# EAGLE board AccessPanelV1 (EAGLE 7.2.0)
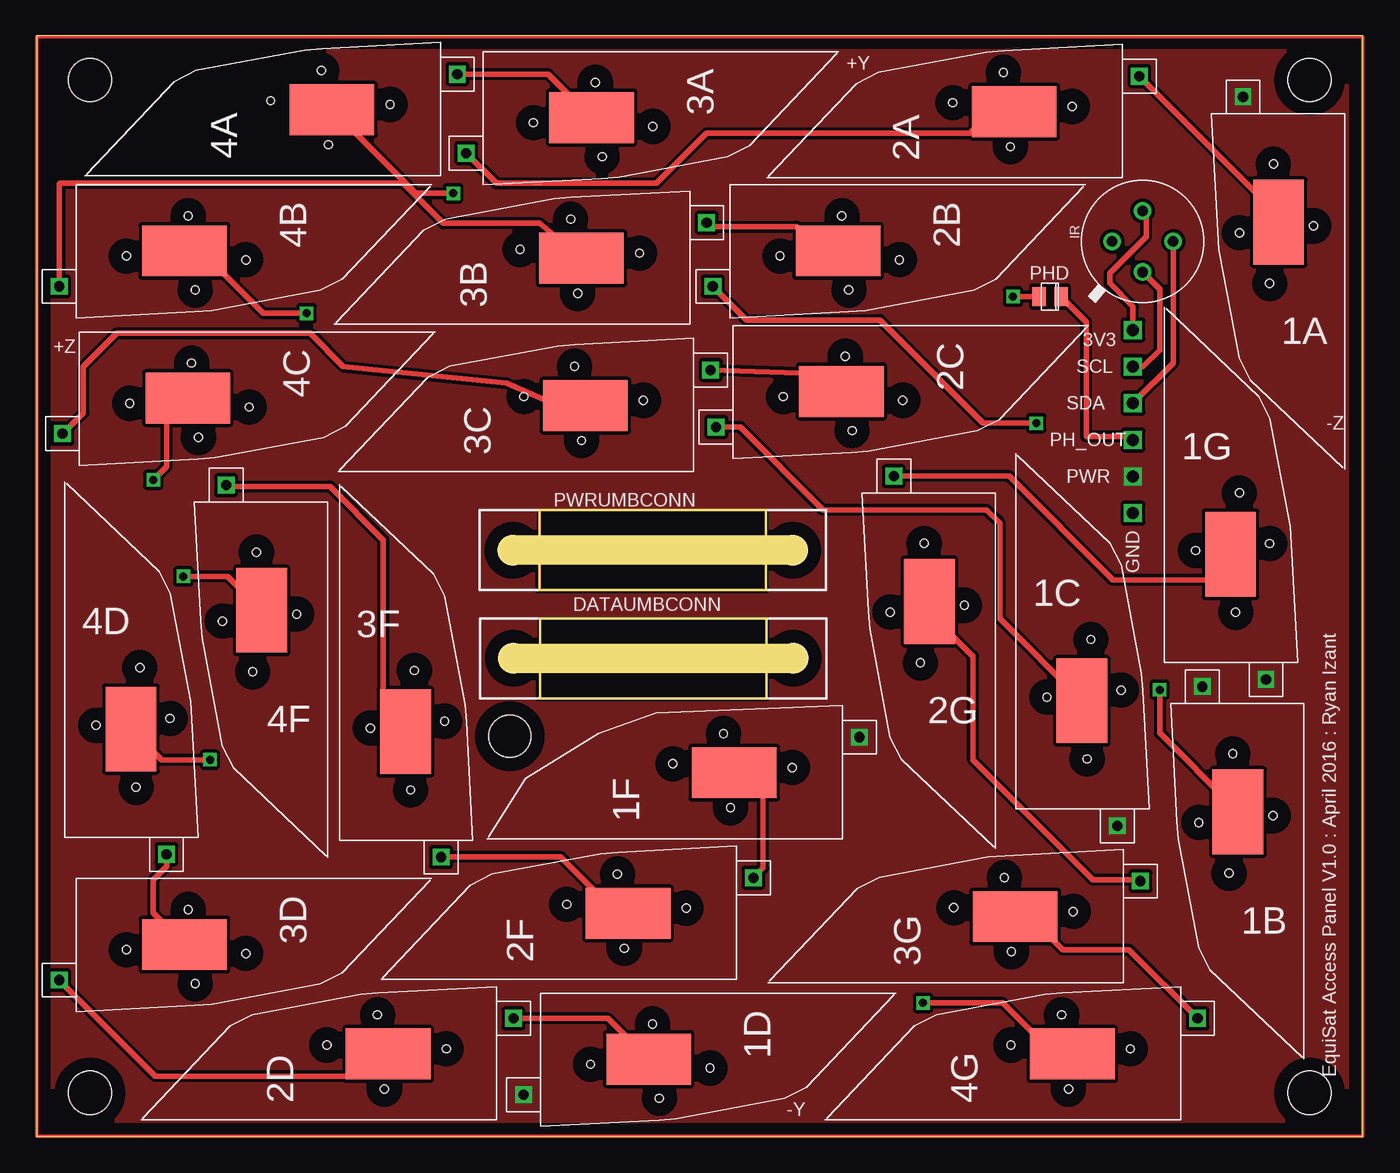
[diagram p0: board, top side]
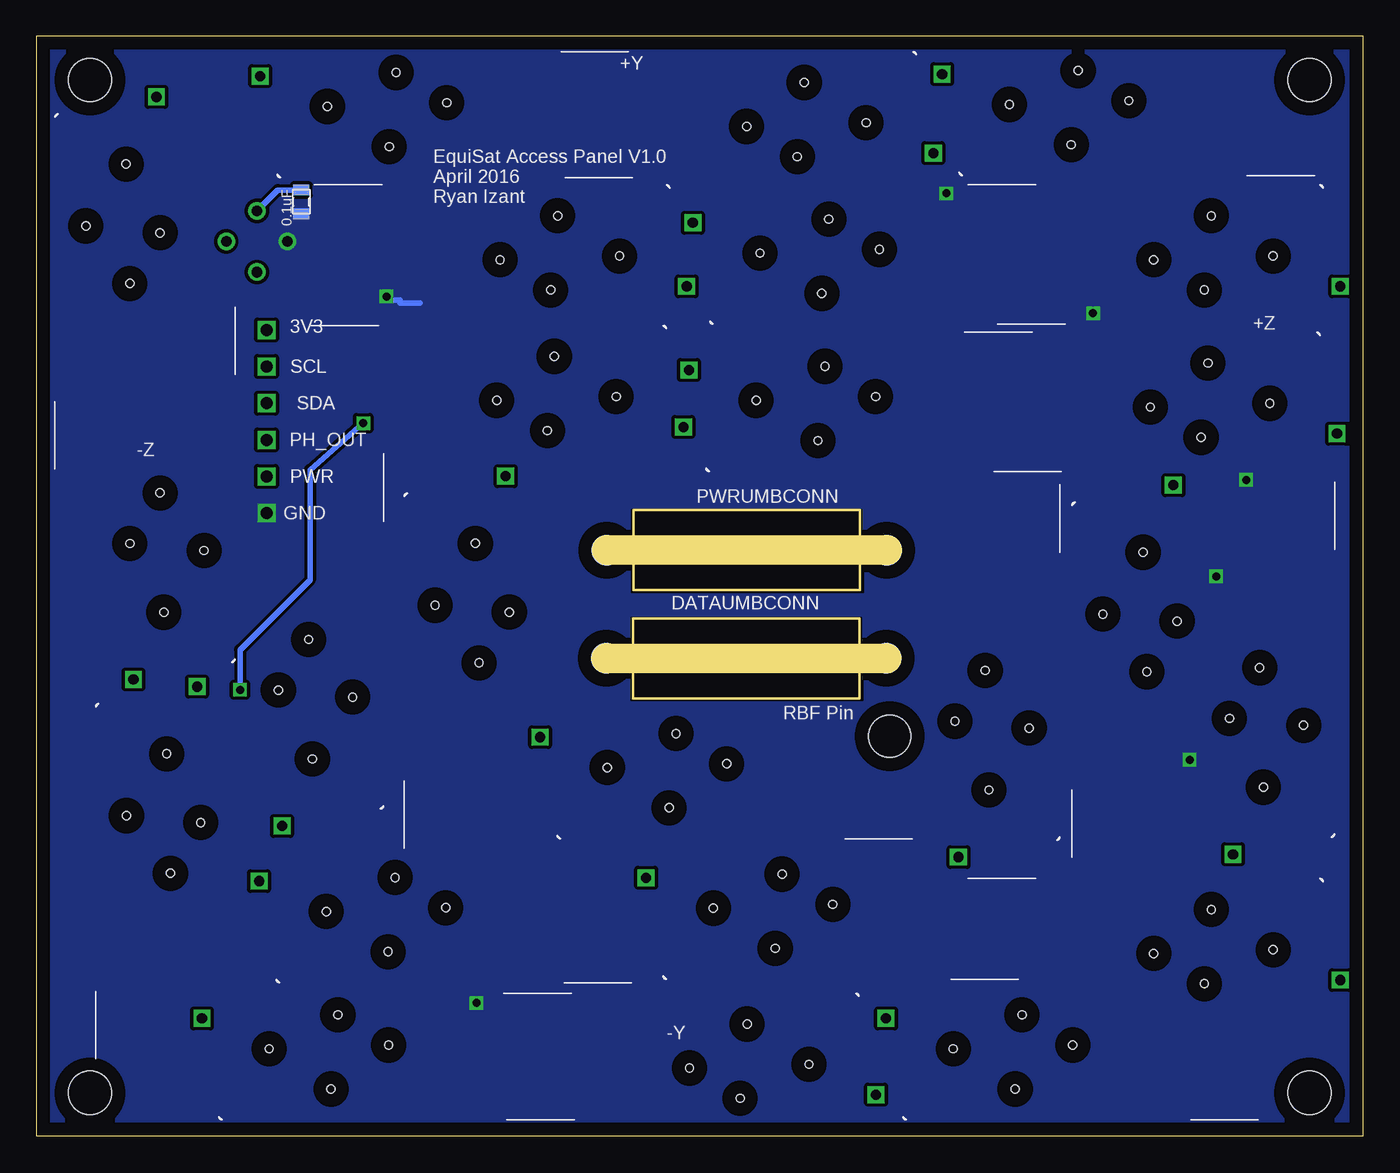
[diagram p1: board, bottom side, seen from below]

Size 99.5 x 82.57 mm. Coordinates in mm from the lower left corner, seen from the top.
Outline: 0,0 99.5,0 99.5,82.57 0,82.57 0,0
Copper layers (1*16): Top 0.035mm / dielectric 1.5mm / Bottom 0.035mm
Design rules "default": minimum track width 10mil, minimum drill 24mil, track to track 8mil, track to pad 8mil, pad to pad 8mil, via to via 8mil, smd to smd 8mil, copper to edge 40mil, drill to drill 8mil, minimum pad ring 10mil, minimum via ring 8mil, stop-mask expansion 4mil, vias tented up to drill 0mil, thermal gap 10mil
Net classes: 0 default: width 0.635 mm, drill 0.508 mm, clearance 0.254 mm
Holes 3.26 mm at 4,3.25 4,79.25 95.5,79.25 95.5,3.25
Holes 3.17 mm at 35.5,30

## Footprints (pad centres in the part's own frame; a part is rotated, then mirrored left to right if it is on the bottom)
SOLARCELL2 = drill 0.76 square: ANODE 7.62,-1.27 | smd 3.81 x 6.35: CATHODE 4.953,8.128 | hole 0.6: 2.32,8.41; 5.62,12.73; 7.89,8.93; 5.34,3.77
0805 = smd 0.8 x 1.2: 1 -0.9,0; 2 0.9,0
HARWIN_PWR_BOARDMOUNT = hole 2.2: -10.5,0; 10.5,0
MXL90614 = drill 0.8: SCL 2.293,0; VDD -2.293,0; VSS 0,-2.294 | drill 0.8 pad 1.2: SDA 0,2.294
PHOTODECTORDEVICE2 = smd 1 x 1.45: GND 0.76,0.4; PWROUT -0.88,0.4

## Placement (x,y rotation side)
1A  NEWSOLARPANEL  [SOLARCELL2]  98.13,76.71 180 top
1B  NEWSOLARPANEL  [SOLARCELL2]  95.08,32.46 180 top
1C  NEWSOLARPANEL  [SOLARCELL2]  73.47,24.54 0 top
1D  NEWSOLARPANEL  [SOLARCELL2]  37.79,10.73 270 top
1F  NEWSOLARPANEL  [SOLARCELL2]  60.46,22.32 90 top
1G  NEWSOLARPANEL  [SOLARCELL2]  84.62,35.54 0 top
2A  NEWSOLARPANEL  [SOLARCELL2]  81.46,71.92 90 top
2B  NEWSOLARPANEL  [SOLARCELL2]  52,71.38 270 top
2C  NEWSOLARPANEL  [SOLARCELL2]  52.25,60.83 270 top
2D  NEWSOLARPANEL  [SOLARCELL2]  34.5,1.22 90 top
2F  NEWSOLARPANEL  [SOLARCELL2]  52.5,11.77 90 top
2G  NEWSOLARPANEL  [SOLARCELL2]  71.93,48.25 180 top
3A  NEWSOLARPANEL  [SOLARCELL2]  33.5,81.38 270 top
3B  NEWSOLARPANEL  [SOLARCELL2]  49,60.92 90 top
3C  NEWSOLARPANEL  [SOLARCELL2]  49.29,49.87 90 top
3D  NEWSOLARPANEL  [SOLARCELL2]  2.96,19.33 270 top
3F  NEWSOLARPANEL  [SOLARCELL2]  22.72,22.21 0 top
3G  NEWSOLARPANEL  [SOLARCELL2]  81.54,11.52 90 top
4A  NEWSOLARPANEL  [SOLARCELL2]  30.29,72.07 90 top
4B  NEWSOLARPANEL  [SOLARCELL2]  2.96,71.38 270 top
4C  NEWSOLARPANEL  [SOLARCELL2]  3.21,60.33 270 top
4D  NEWSOLARPANEL  [SOLARCELL2]  2.12,22.42 0 top
4F  NEWSOLARPANEL  [SOLARCELL2]  21.83,47.58 180 top
4G  NEWSOLARPANEL  [SOLARCELL2]  85.83,1.22 90 top
C1  0.1uF  [0805]  79.64,70.09 90 bottom
DATAUMBCONN  HARWIN_PWR_BOARDMOUNT  [HARWIN_PWR_BOARDMOUNT]  46.26,35.86 180 top
IR  MXL90620  [MXL90614]  82.98,67.13 270 top
PHD  PHOTODETECTOR  [PHOTODECTORDEVICE2]  75.97,63.39 180 top
PWRUMBCONN  HARWIN_PWR_BOARDMOUNT  [HARWIN_PWR_BOARDMOUNT]  46.22,43.97 180 top

## Library data of the parts
1A 1B 1C 1D 1G 2A 2B 2C 2D 2F 2G 3A 3B 3C 3D 3F 3G 4A 4B 4C 4D 4F 4G = Solar Panel Parts
1F PHD = solarcellnew
C1 DATAUMBCONN IR PWRUMBCONN = CNTRL_BOARD

## Nets
3V3: C1.2 IR.VDD
GND: 4A.CATHODE 4B.CATHODE 4C.CATHODE 4D.CATHODE 4F.CATHODE 4G.CATHODE C1.1 IR.VSS PHD.GND
N$1: 2A.CATHODE 3A.ANODE
N$2: 1C.CATHODE 2C.ANODE
N$3: 2B.CATHODE 3B.ANODE
N$4: 2C.CATHODE 3C.ANODE
N$5: 2D.CATHODE 3D.ANODE
N$6: 3C.CATHODE 4C.ANODE
N$8: 2F.CATHODE 3F.ANODE
N$9: 1B.CATHODE 2B.ANODE
N$10: 2G.CATHODE 3G.ANODE
N$11: 3G.CATHODE 4G.ANODE
N$12: 1D.CATHODE 2D.ANODE
N$13: 3F.CATHODE 4F.ANODE
N$15: 3D.CATHODE 4D.ANODE
N$16: 3B.CATHODE 4B.ANODE
N$17: 3A.CATHODE 4A.ANODE
N$18: 1A.CATHODE 2A.ANODE
N$24: 1G.CATHODE 2G.ANODE
N$32: 1F.CATHODE 2F.ANODE
PDOUT: PHD.PWROUT
PWR: 1A.ANODE 1B.ANODE 1C.ANODE 1D.ANODE 1F.ANODE 1G.ANODE
SCL: IR.SCL
SDA: IR.SDA

## Tracks (layer width: path | path; a pad name or v marks a point on that pad's centre or on a via)
3V3  (via drill 0.9)
  Top 0.406: v82.25,60.5 82.25,62.25 80.5,64 80.5,64.75 83.25,67.5 83.25,69.15 IR.VDD
  Bottom 0.406: IR.VDD 81.41,70.99 C1.2
GND  (via drill 0.6, 0.9)
  Top 0.406: PHD.GND v73.25,63 | 4A.CATHODE 28.43,70.75 v31.25,70.75 | 4B.CATHODE 12.27,65.25 13.5,65.25 17,61.75 v20.25,61.75 | v8.75,49.25 9.75,50.25 9.75,54.5 10.63,55.38 4C.CATHODE | 4F.CATHODE 14.33,42 v11,42 | v13,28.25 9.37,28.25 4D.CATHODE | 4G.CATHODE 76.12,7.75 74.75,7.75 72.5,10 v66.5,10
  Bottom 0.406: v73.25,63 73,62.75 72.25,62.75 72.25,62.5 70.75,62.5
  other vias: 82.25,46.75
  pour Bottom (no thermals): -6.5,85.25 112.5,85.25 112.5,-5.25 -6.5,-5.25
N$1
  Top 0.406: 3A.ANODE 34.49,71.5 46.5,71.5 50.25,75.25 70,75.25 71.62,76.87 2A.CATHODE
N$2
  Top 0.406: 1C.CATHODE 72.25,38.84 72.25,46 71.25,47 59,47 52.79,53.21 2C.ANODE
N$3
  Top 0.406: 3B.ANODE 50.06,68.25 57,68.25 58.82,66.43 2B.CATHODE
N$4
  Top 0.406: 2C.CATHODE 58.76,57.5 57.5,57.5 57.24,57.24 3C.ANODE
N$5
  Top 0.406: 2D.CATHODE 25.17,6.17 23.5,4.5 8.9,4.5 3D.ANODE
N$6
  Top 0.406: 4C.ANODE 3.5,54.27 3.5,57.75 6,60.25 20.5,60.25 23,57.75 35.25,56.5 39.68,54.57 3C.CATHODE
N$7
  Top 0.25: 0,0 99.5,0 99.5,82.5 0,82.5 0,0
N$8
  Top 0.406: 2F.CATHODE 42.84,18.25 42,18.25 39.31,20.94 3F.ANODE
N$9  (via drill 0.6)
  Top 0.406: 2B.ANODE 53.24,61.25 63.25,61.25 71,53.5 v75,53.5 | v84.25,33.5 84.25,30.25 89.75,24.75 89.75,24.71 1B.CATHODE
  Bottom 0.406: v75,53.5 79,50 79,41.75 84.25,36.5 v84.25,33.5
N$10
  Top 0.406: 3G.ANODE 82.7,19.25 79.25,19.25 70.25,28.25 70.25,36 66.98,39.27 2G.CATHODE
N$11
  Top 0.406: 4G.ANODE 81.94,14 77,14 74.53,16.47 3G.CATHODE
N$12
  Top 0.406: 1D.CATHODE 42.85,8.84 2D.ANODE
N$13
  Top 0.406: 4F.ANODE 14.31,48.75 22,48.75 26,44.75 26,32.75 27.67,31.08 3F.CATHODE
N$15
  Top 0.406: 4D.ANODE 9.74,20.24 8.75,19.25 8.75,16.75 11.5,14 11.46,14 3D.CATHODE
N$16
  Top 0.406: 3B.CATHODE 37.74,68.5 30.5,68.5 27.5,71.5 1.75,71.5 1.69,71.44 4B.ANODE
N$17
  Top 0.406: 3A.CATHODE 38.37,79.69 4A.ANODE
N$18
  Top 0.406: 1A.CATHODE 91.5,70.26 91.5,70.75 82.73,79.52 2A.ANODE
N$24
  Top 0.406: 1G.CATHODE 88.25,42.34 88.25,41.5 88,41.75 80.75,41.75 72.98,49.52 2G.ANODE
N$32
  Top 0.406: 2F.ANODE 54.5,20.12 54.5,26.5 53.73,27.27 1F.CATHODE
PDOUT  (via drill 0.9)
  Top 0.406: v82.25,52.25 82,52.5 78.75,52.5 78.75,61.09 PHD.PWROUT
PWR  (via drill 0.9)
  other vias: 82.25,49.5
  pour Top (no thermals): -6,84.75 110.5,84.75 110.5,-5 -6,-5
SCL  (via drill 0.9)
  Top 0.406: v82.25,57.75 83,57.75 84.25,59 84.25,63.57 IR.SCL
SDA  (via drill 0.9)
  Top 0.406: IR.SDA 85.27,58.02 v82.25,55

## Text on the board
Dimension: +Y | +Z | -Z | Access Port Region | -Y
tNames: +Y | 3V3 | +Z | SCL | SDA | -Z | PH_OUT | PWR | GND | EquiSat Access Panel V1.0 : April 2016 : Ryan Izant | -Y
bNames: +Y | EquiSat Access Panel V1.0 / April 2016 / Ryan Izant | +Z | 3V3 | SCL | SDA | PH_OUT | -Z | PWR | PWRUMBCONN | GND | DATAUMBCONN | RBF Pin | -Y
tValues: RBF Pin